# Altium PCB PCB2.PcbDoc
Units mm, origin at the board's own origin, x right, y up, seen from the top; angles counter-clockwise.
Board outline 44.7 x 38.55 mm, 2 copper layers (Top Layer, Bottom Layer), stack 1.569 mm thick; 16 components, 2 nets, 96 pads, 0 vias.
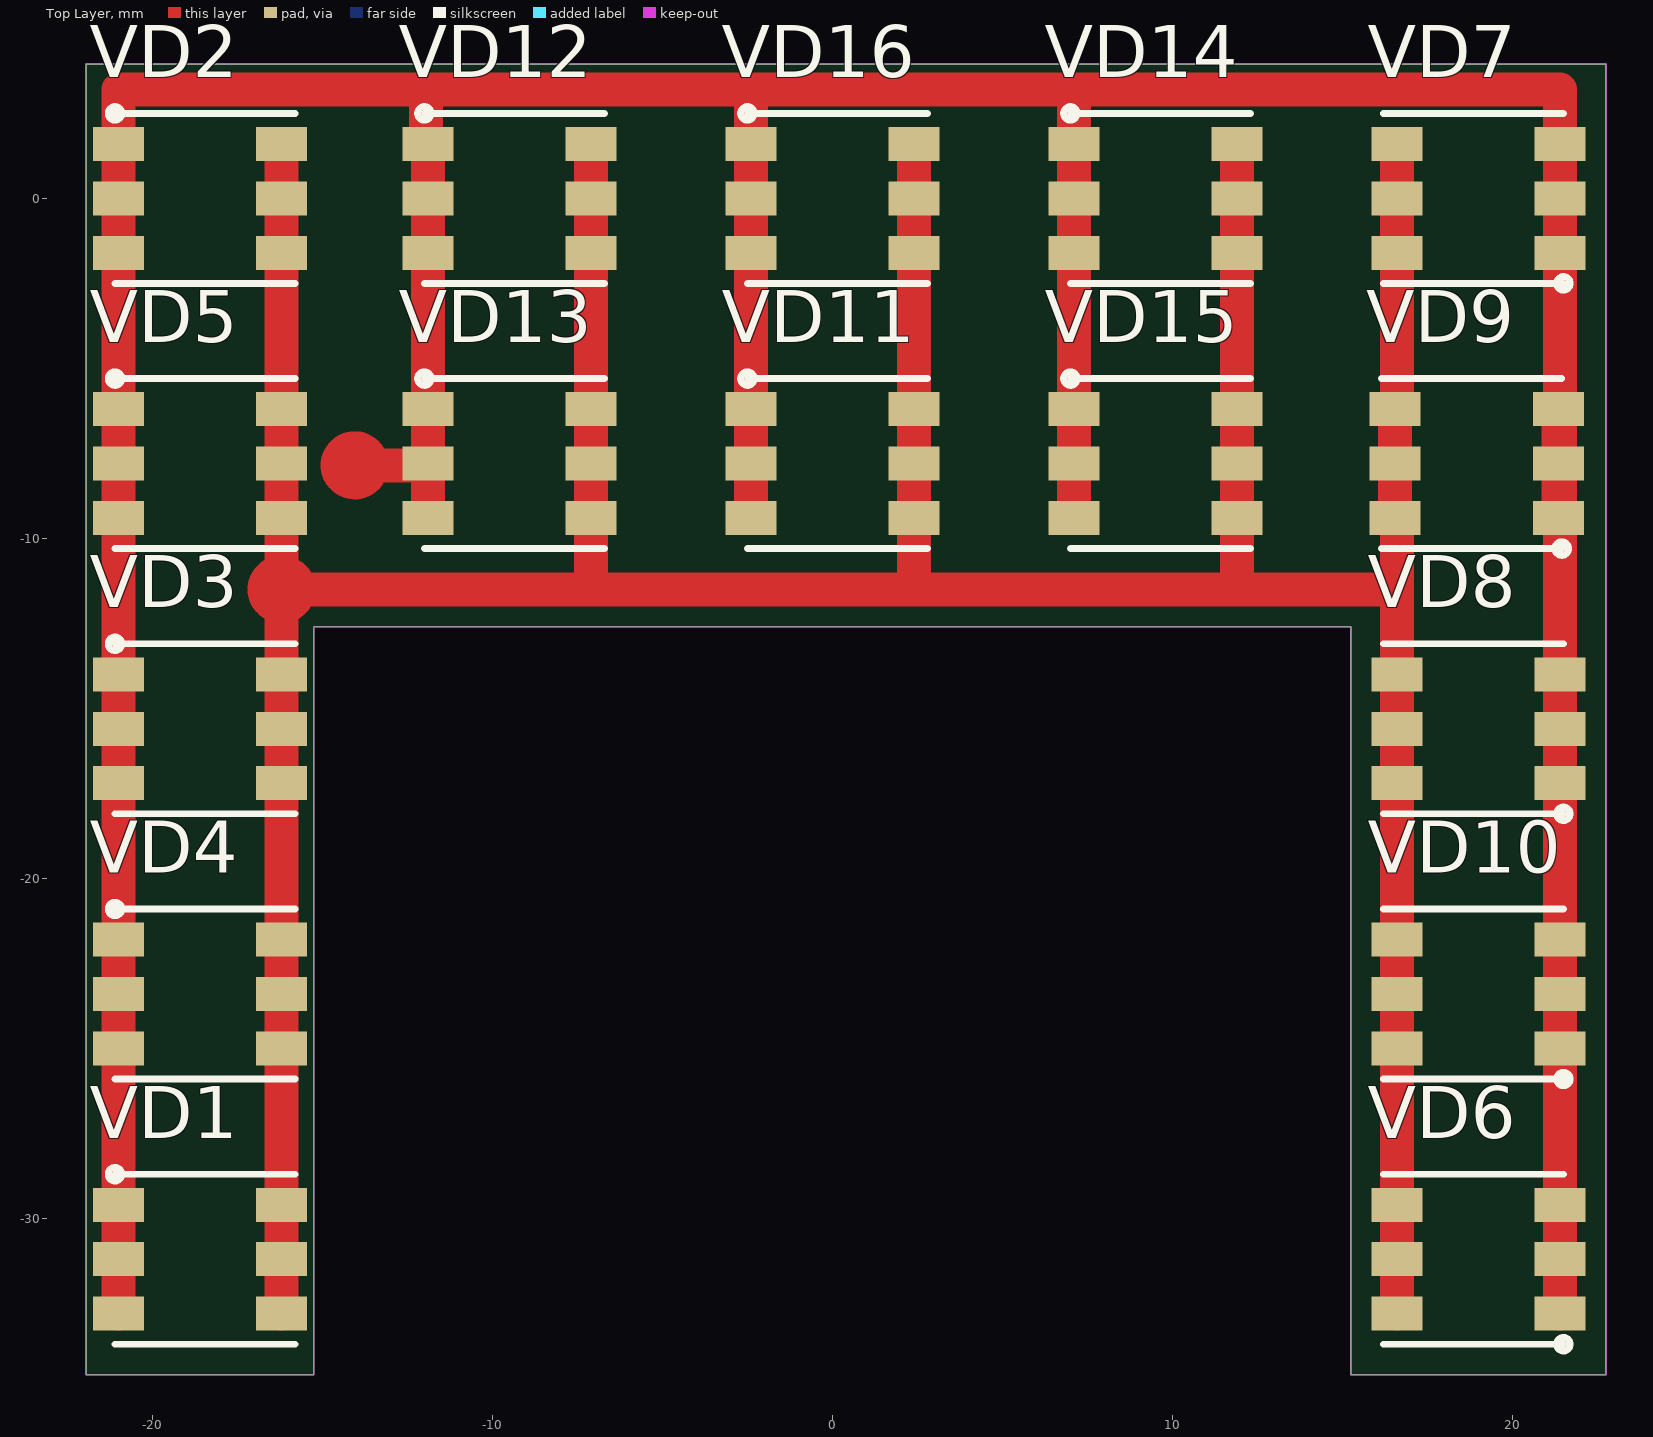
[diagram p0: Top Layer view]
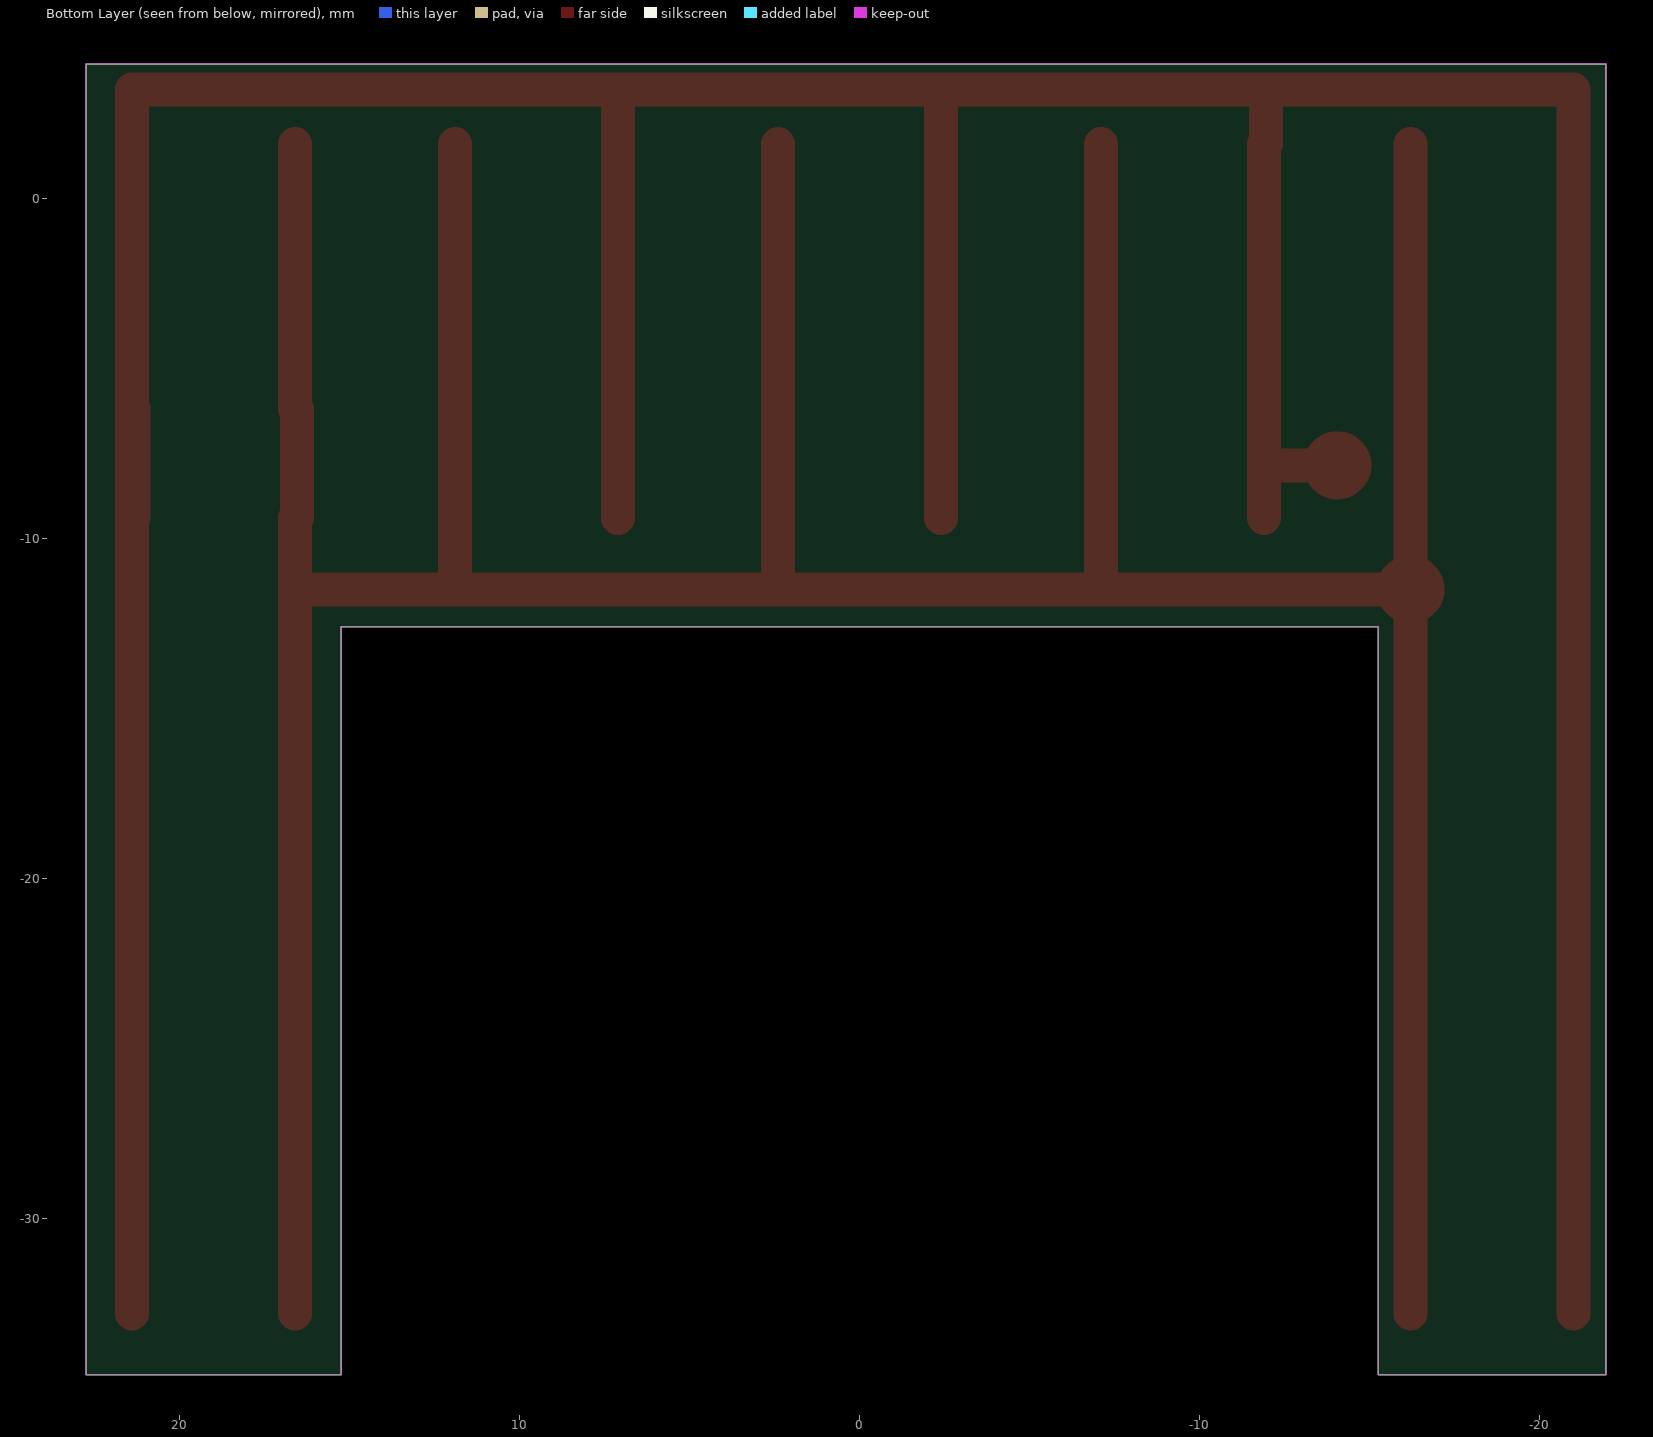
[diagram p1: Bottom Layer view, seen from below]
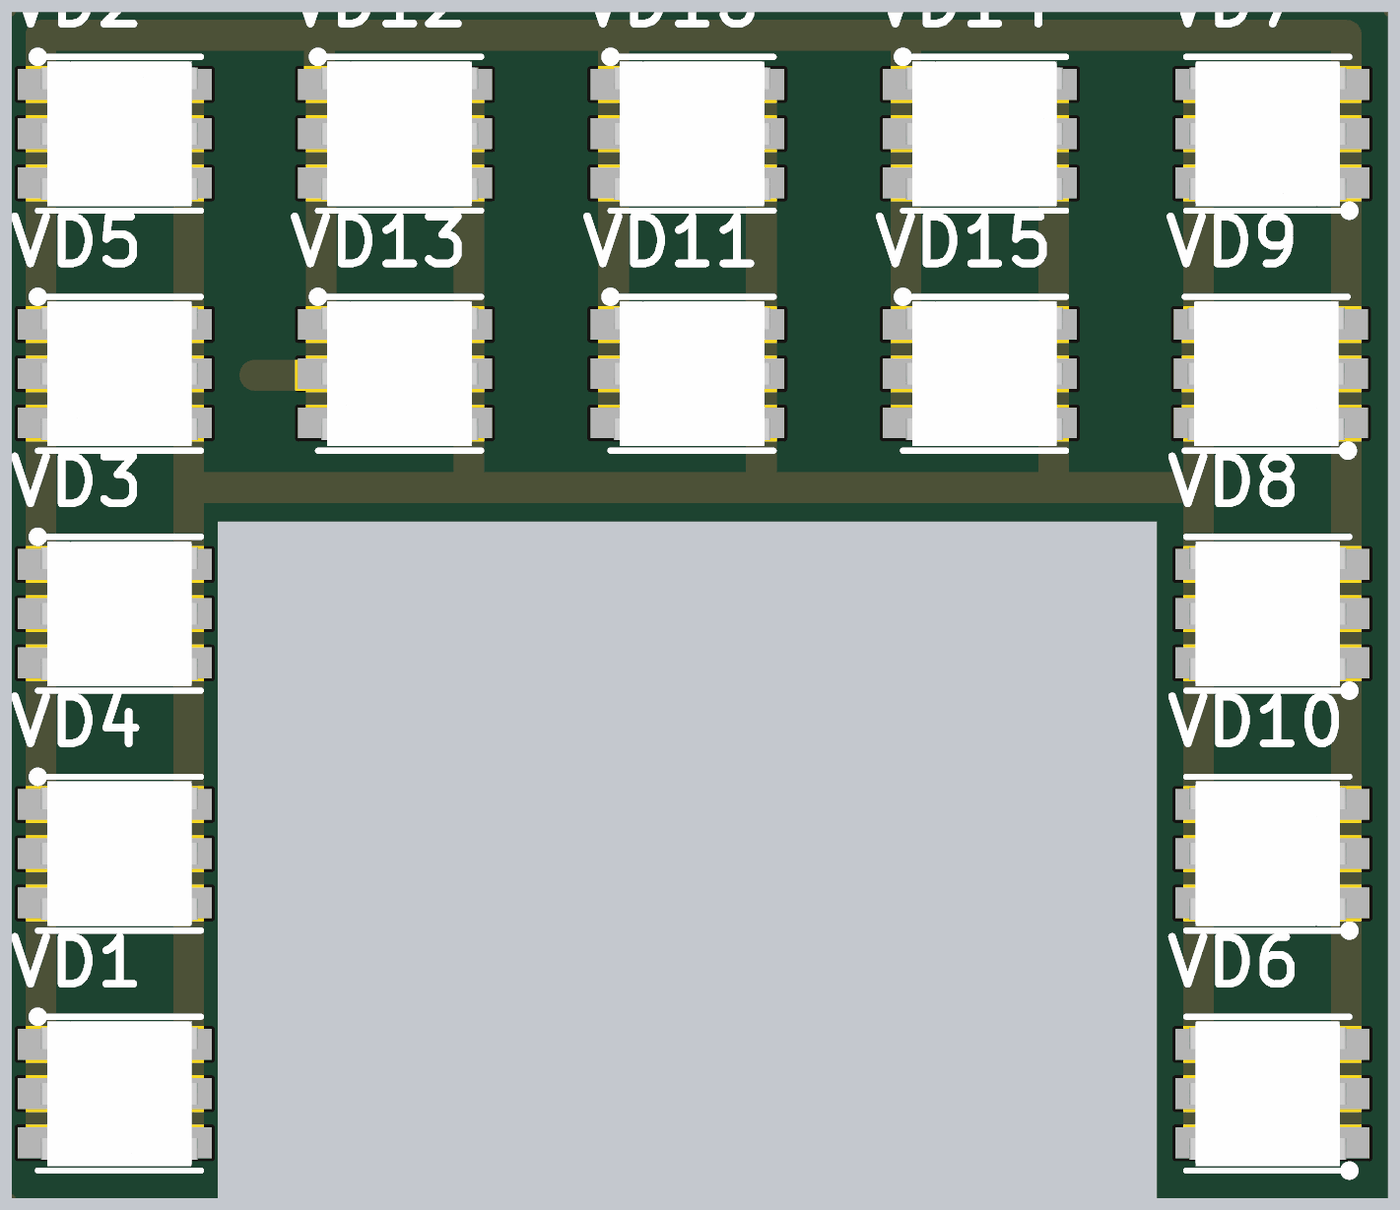
[diagram p2: 3D render of the assembled board from above, using the file's embedded part models]

## Layer stack, top to bottom
Top Solder: solder mask 0.0254, SM-001, Dk 4
Top Layer: signal copper 0.035
Dielectric 1: core 1.4986, Core-043, Dk 4.3
Bottom Layer: signal copper 0.035
Bottom Solder: solder mask 0.0254, SM-001, Dk 4

## Board outline
-21.95,-34.6 -21.95,3.95 22.75,3.95 22.75,-34.6 15.25,-34.6 15.25,-12.6 -15.25,-12.6 -15.25,-34.6

## Design rules (kind name [scope] priority, off if disabled: settings)
Clearance [All] p1: gap=0.254 ignorepadtopadclearanceinfootprint=FALSE except(0: Arc-Hole Track-Hole SMDPad-Hole THPad-Hole Via-Hole Fill-Hole Poly-Hole Region-Hole Text-Hole)
PolygonConnect [All] p1: connectstyle=Relief reliefconductorwidth=0.254 reliefentries=4 polygonreliefangle="90 Angle" airgapwidth=0.254
RoutingVias [All] p1: holewidth=0.711 width=1.27 viastyle="Through Hole" minholewidth=0.711 minwidth=1.27 maxholewidth=0.711 maxwidth=1.27
SolderMaskExpansion [All] p1: expansion=0.102 istentingtop=FALSE
Width [All] p1: maxlimit=5 minlimit=0.254 preferedwidth=0.254
30 further rules are at their usual default settings.

## Components (designator, comment, footprint, x,y, rotation, side; value= is the part's Value field where it differs from the comment)
VD1 "LED, , *, *, *, -55...+150°C" "LED 5050" -18.6,-31.2 r180 top
VD2 "LED, , *, *, *, -55...+150°C" "LED 5050" -18.6,0 r180 top
VD3 "LED, , *, *, *, -55...+150°C" "LED 5050" -18.6,-15.6 r180 top
VD4 "LED, , *, *, *, -55...+150°C" "LED 5050" -18.6,-23.4 r180 top
VD5 "LED, , *, *, *, -55...+150°C" "LED 5050" -18.6,-7.8 r180 top
VD6 "LED, , *, *, *, -55...+150°C" "LED 5050" 19,-31.2 r0 top
VD7 "LED, , *, *, *, -55...+150°C" "LED 5050" 19,0 r0 top
VD8 "LED, , *, *, *, -55...+150°C" "LED 5050" 19,-15.6 r0 top
VD9 "LED, , *, *, *, -55...+150°C" "LED 5050" 18.95,-7.8 r0 top
VD10 "LED, , *, *, *, -55...+150°C" "LED 5050" 19,-23.4 r0 top
VD11 "LED, , *, *, *, -55...+150°C" "LED 5050" 0,-7.8 r180 top
VD12 "LED, , *, *, *, -55...+150°C" "LED 5050" -9.5,0 r180 top
VD13 "LED, , *, *, *, -55...+150°C" "LED 5050" -9.5,-7.8 r180 top
VD14 "LED, , *, *, *, -55...+150°C" "LED 5050" 9.5,0 r180 top
VD15 "LED, , *, *, *, -55...+150°C" "LED 5050" 9.5,-7.8 r180 top
VD16 "LED, , *, *, *, -55...+150°C" "LED 5050" 0,0 r180 top

## Footprints (in the part's own frame and the unit in brackets; to place one, negate y for a bottom-side part, rotate by r counter-clockwise, add the part's x,y. Pads: shape width x height; smd on the part's side, far side on the other; paste and mask are expansions set on the pad)
"LED 5050" [mm] "SMD Led 5050"
  rect 1.5x1 smd: 1(-2.4,1.6) 2(2.4,1.6) 3(-2.4,0) 4(2.4,0) 5(-2.4,-1.6) 6(2.4,-1.6)
  silkscreen extent -2.8,-2.7 2.7,2.5, body extent -2.7,-2.35 2.4,2.35, height 1.3

## Part data
VD1 VD2 VD3 VD4 VD5 VD6 VD7 VD8 VD9 VD10 VD11 VD12 VD13 VD14 VD15 VD16: library part "LED 5050", Temperature=-55...+150°C, TypeDiode=LED, ValueManufacturerPartNumber="LED, , *, *, *, -55...+150°C"

## Nets (pads, with @x,y where several pads share a name; then routed paths per layer and width w, separated by ;. In a path a pad name is that pad's centre, name@x,y a point inside that pad or via, vN(x,y) a via of type N, cw(c..) or ccw(c..) an arc to the next point about the centre after c; other vN are vias at no path point)
GND: VD1.1 VD1.3 VD1.5 VD2.1 VD2.3 VD2.5 VD3.1 VD3.3 VD3.5 VD4.1 VD4.3 VD4.5 VD5.1 VD5.3 VD5.5 VD6.1 VD6.3 VD6.5 VD7.1 VD7.3 VD7.5 VD8.1 VD8.3 VD8.5 VD9.1 VD9.3 VD9.5 VD10.1 VD10.3 VD10.5 VD11.1 VD11.3 VD11.5 VD12.1 VD12.3 VD12.5 VD13.1 VD13.3 VD13.5 VD14.1 VD14.3 VD14.5 VD15.1 VD15.3 VD15.5 VD16.1 VD16.3 VD16.5 | length 153.9
  Top Layer w1: VD1.5 VD1.3 VD1.1 -16.2,-11.5 ; VD4.1 VD4.3 VD4.5 ; VD3.1 VD3.3 VD3.5 ; VD2.5 VD2.3 VD2.1 VD5.5 VD5.3 VD5.1 -16.2,-11.5 ; VD12.5 VD12.3 VD12.1 VD13.5 VD13.3 VD13.1 -7.1,-11.35 -6.95,-11.5 ; VD16.5 VD16.3 VD16.1 VD11.5 VD11.3 VD11.1 2.4,-11.45 2.45,-11.5 ; VD14.5 VD14.3 VD14.1 VD15.5 VD15.3 VD15.1 11.9,-11.45 11.85,-11.5 ; VD6.5 VD6.3 VD6.1 VD10.5 VD10.3 VD10.1 VD8.5 VD8.3 VD8.1 16.6,-11.4 ; VD7.1 VD7.3 VD7.5 16.6,-6.2 VD9.1 VD9.3 VD9.5 16.6,-9.4 16.6,-11.4 ; -16.2,-11.5 -6.95,-11.5 ; -6.95,-11.5 2.45,-11.5 ; 2.45,-11.5 11.85,-11.5 ; 11.85,-11.5 16.5,-11.5 16.6,-11.4 ; -15.7,-11.5 ccw(c-16.2,-11.5) -15.7,-11.5
VCC: VD1.2 VD1.4 VD1.6 VD2.2 VD2.4 VD2.6 VD3.2 VD3.4 VD3.6 VD4.2 VD4.4 VD4.6 VD5.2 VD5.4 VD5.6 VD6.2 VD6.4 VD6.6 VD7.2 VD7.4 VD7.6 VD8.2 VD8.4 VD8.6 VD9.2 VD9.4 VD9.6 VD10.2 VD10.4 VD10.6 VD11.2 VD11.4 VD11.6 VD12.2 VD12.4 VD12.6 VD13.2 VD13.4 VD13.6 VD14.2 VD14.4 VD14.6 VD15.2 VD15.4 VD15.6 VD16.2 VD16.4 VD16.6 | length 176.7
  Top Layer w1: VD1.6 VD1.4 VD1.2 VD5.2 VD5.4 VD5.6 VD2.2 VD2.4 VD2.6 -21,3.2 -11.95,3.2 ; VD4.2 VD4.4 VD4.6 ; VD3.2 VD3.4 VD3.6 ; -14.05,-7.85 -13.55,-7.85 ; VD13.2 VD13.4@-11.9,-7.85 ; VD11.2 VD11.4 VD11.6 VD16.2 VD16.4 VD16.6 -2.4,3.2 ; VD15.2 VD15.4 VD15.6 VD14.2 VD14.4 VD14.6 7.1,3.2 ; VD9.6 VD9.4 VD9.2 ; VD6.6 VD6.4 VD6.2 VD7.6 VD7.4 VD7.2 21.4,3.2 7.1,3.2 ; VD10.6 VD10.4 VD10.2 ; VD8.6 VD8.4 VD8.2 ; -13.55,-7.85 ccw(c-14.05,-7.85) -13.55,-7.85 ; -13.55,-7.85 VD13.4@-11.9,-7.85 ; -11.95,3.2 -2.4,3.2 ; -11.95,3.2 -11.95,1.6 VD12.6 VD12.4 VD12.2 VD13.6 VD13.4 VD13.4@-11.9,-7.85 ; -2.4,3.2 7.1,3.2

## Keep-outs
Keep-Out Layer:
  lines w0.05: -21.95,-34.6 -15.25,-34.6 -15.25,-12.6 15.25,-12.6 15.25,-34.6 22.75,-34.6 22.75,3.95 -21.95,3.95 -21.95,-34.6 ; 15.25,-27.1 15.25,-27.1

## Dimensions
-21.95,-34.6 to -21.95,3.95 on Top Layer
-21.95,3.95 to 22.75,3.95 on Top Layer